# Altium PCB PHY.PcbDoc
Units mil, origin at the board's own origin, x right, y up, seen from the top; angles counter-clockwise.
Board outline 3245 x 2060 mil, 6 copper layers (Top Layer, Signal Layer 1, Plano 1, Signal Layer 2, Plano 2, Bottom Layer), stack 49.234 mil thick; 52 components, 54 nets, 192 pads, 51 vias.
Unrouted connection lines stored in the file: 9.
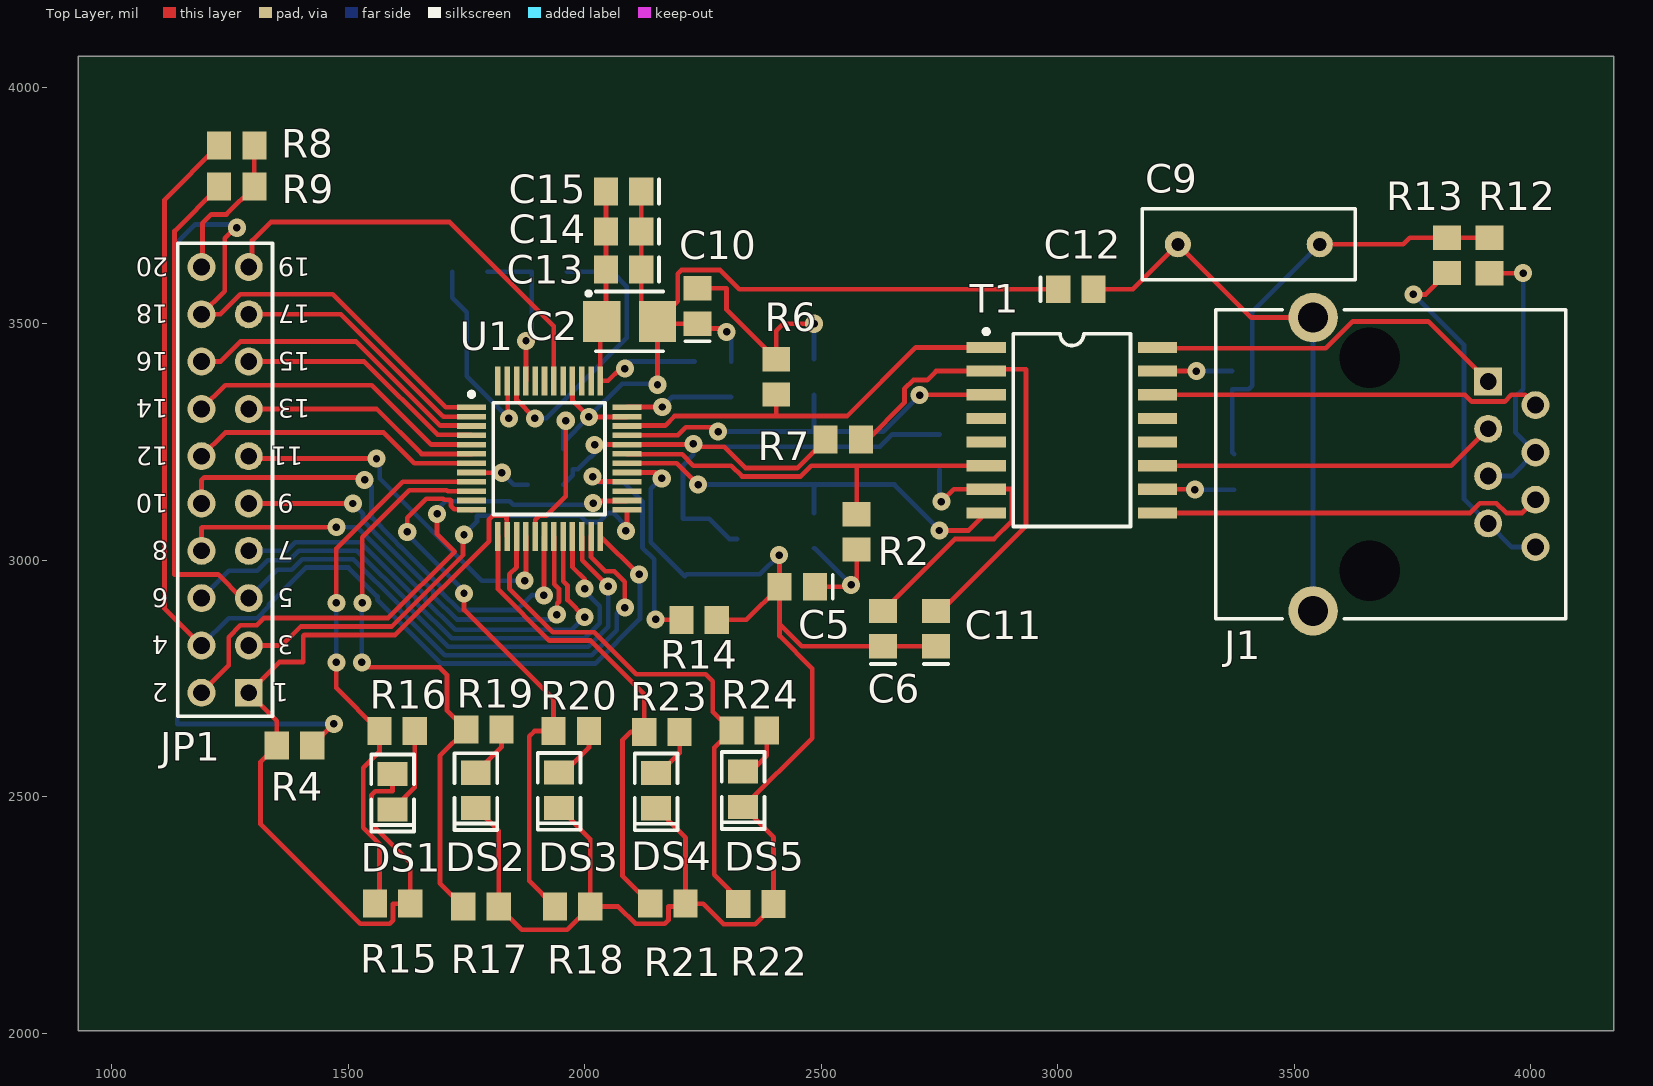
[diagram p0: Top Layer view]
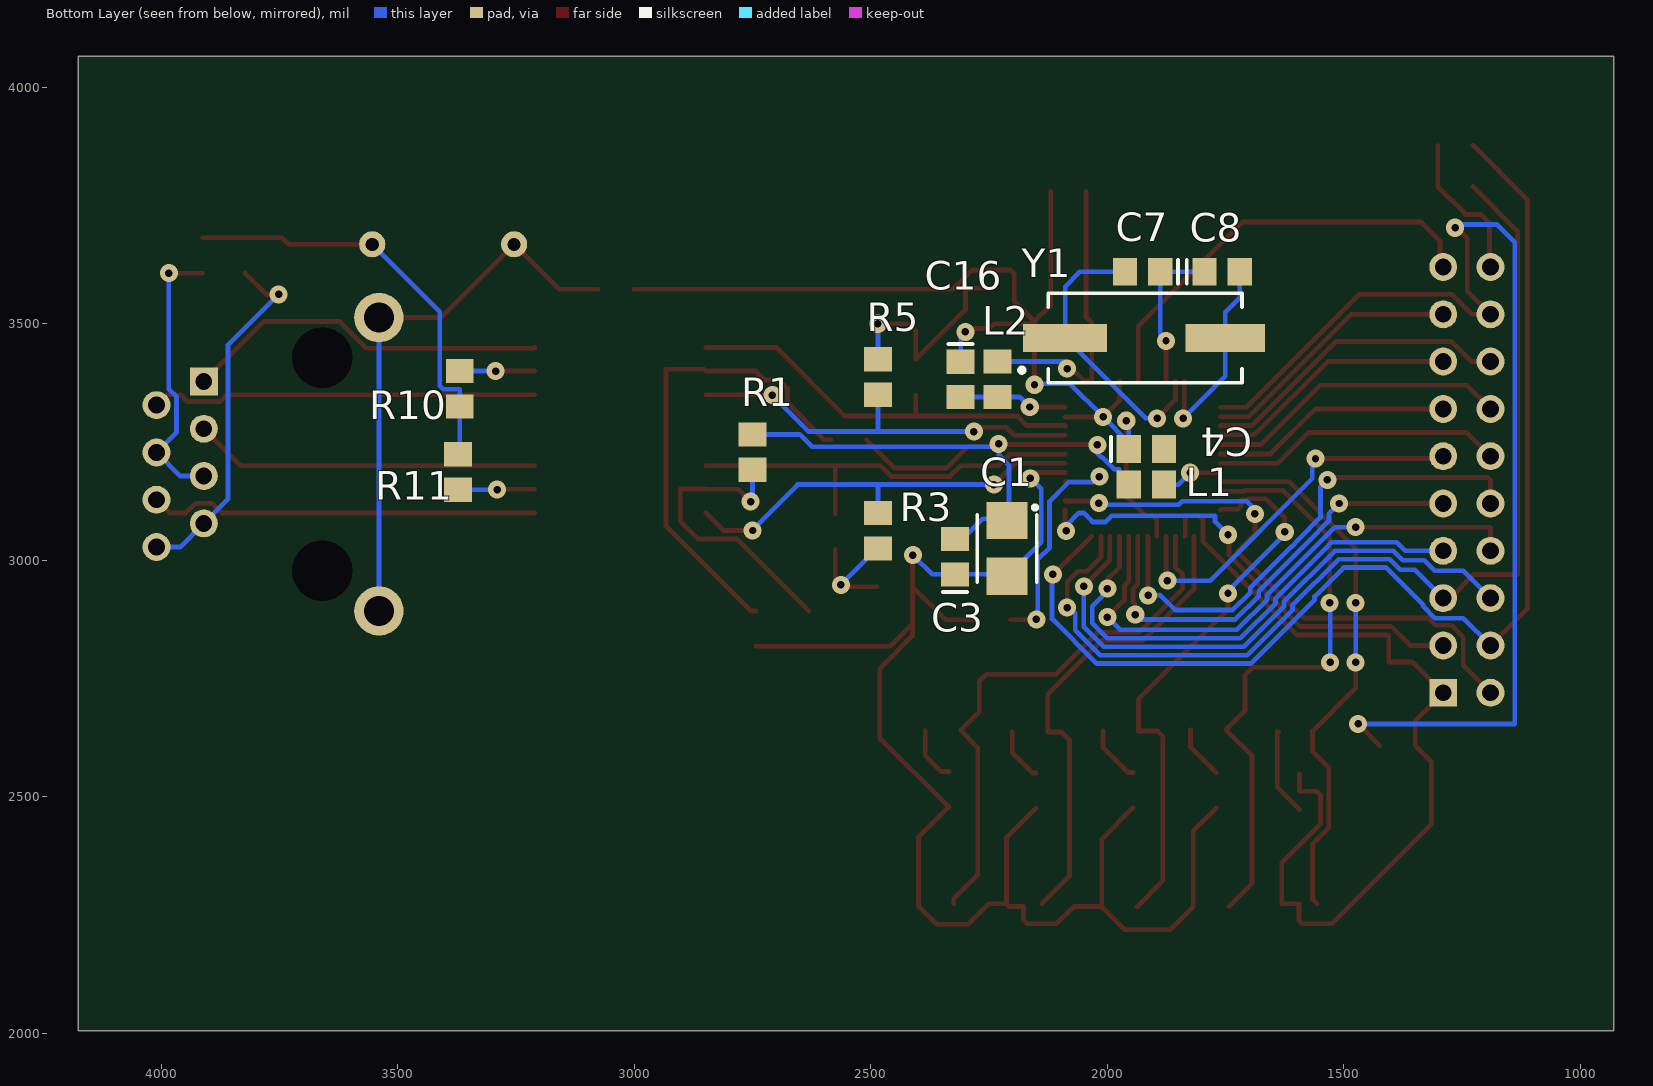
[diagram p1: Bottom Layer view, seen from below]
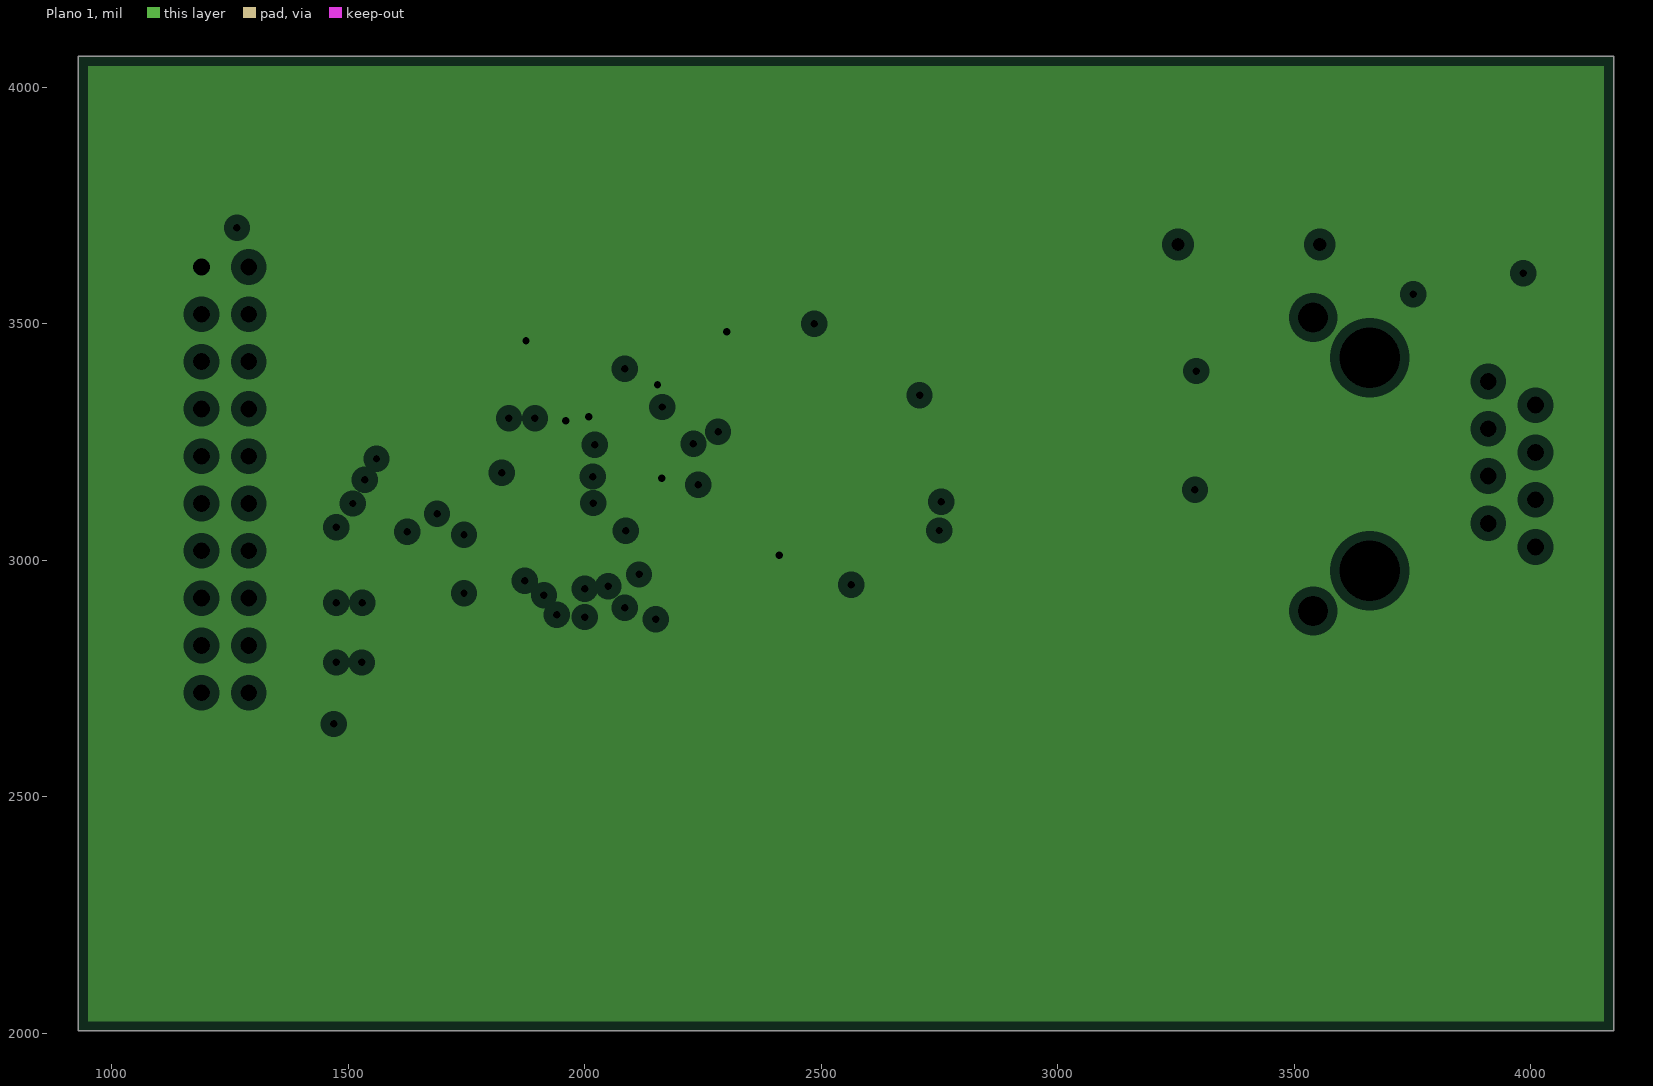
[diagram p2: Plano 1, clearances drawn from the general rule]
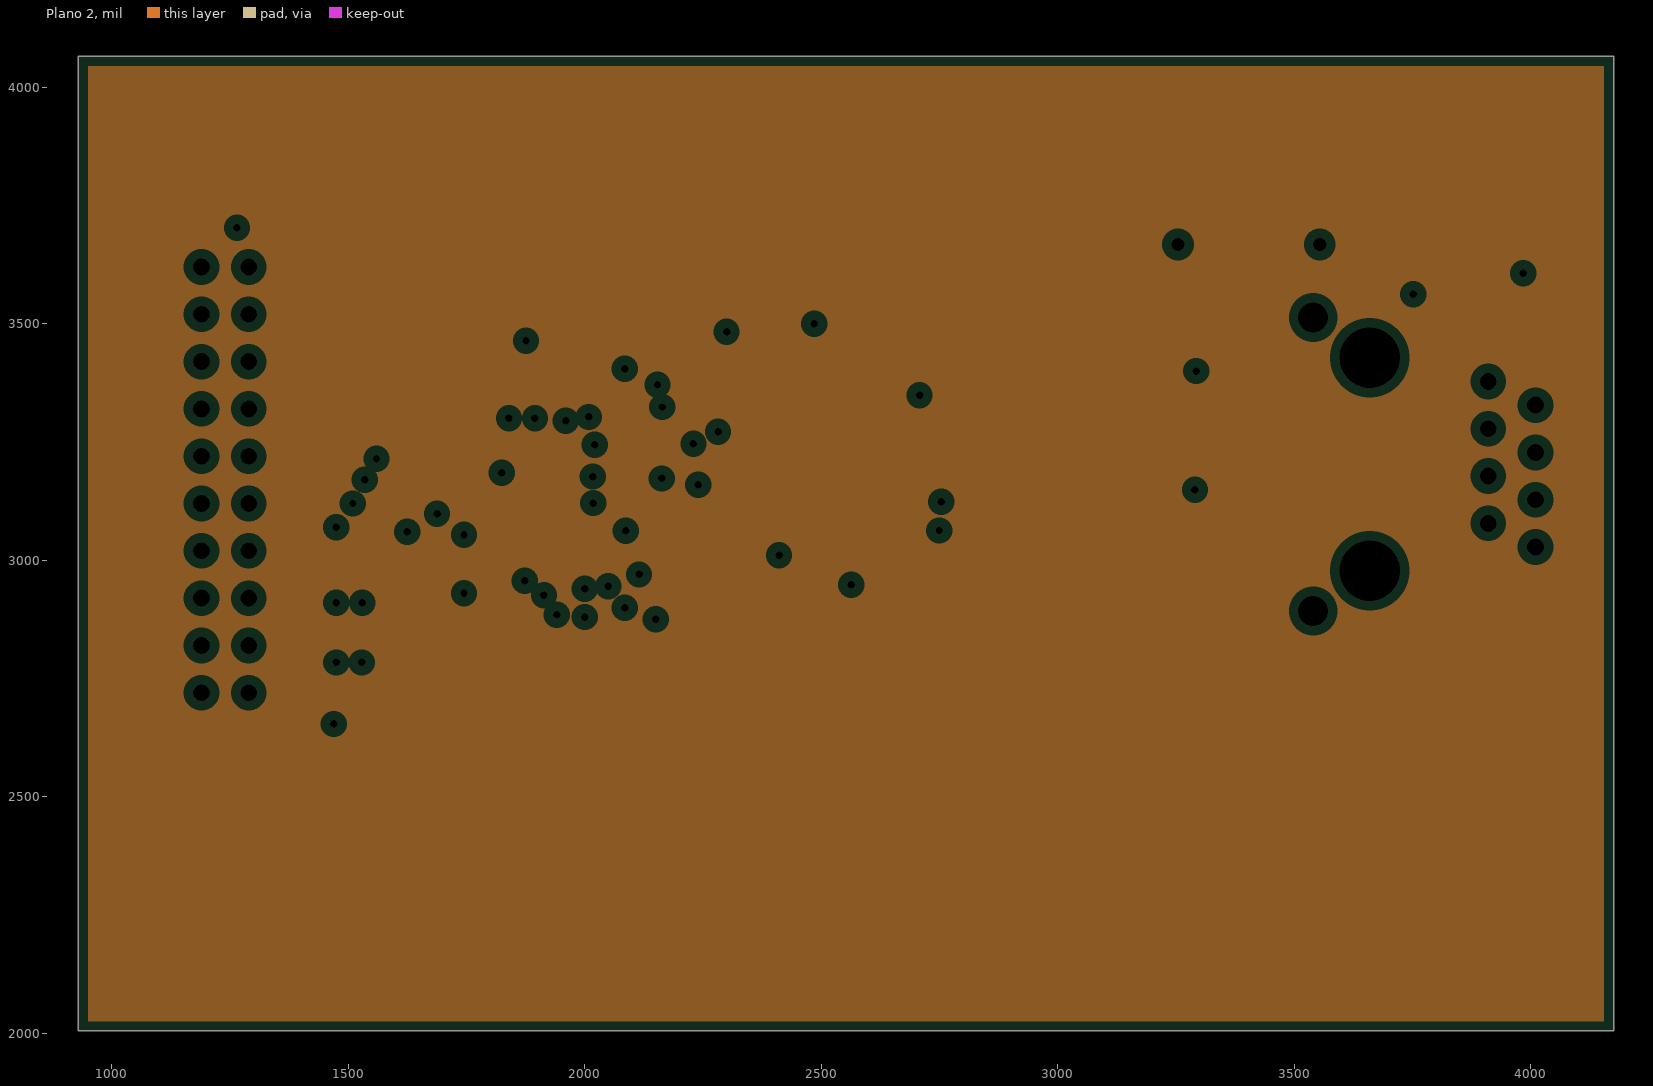
[diagram p3: Plano 2, clearances drawn from the general rule]

## Layer stack, top to bottom
Top Solder: solder mask 0.4, Solder Resist, Dk 3.5
Top Layer: signal copper 1.4
Dielectric1: core 10, FR-4, Dk 4.2
Signal Layer 1: signal copper 1.417
Dielectric 3: prepreg 5, Dk 4.2
Plano 1: plane copper 1.8, net GND
Dielectric 4: core 10, Dk 4.2
Signal Layer 2: signal copper 1.417
Dielectric 5: prepreg 5, Dk 4.2
Plano 2: plane copper 1.8
Dielectric 2: core 10, Dk 4.2
Bottom Layer: signal copper 1.4
Bottom Solder: solder mask 0.4, Solder Resist, Dk 3.5

## Board outline
930,4050 930,4062 930,4065 935,4065 940,4065 949,4065 968,4065 1770,4065 2572,4065 4175,4065 4175,3565 4175,3066 4175,2069 4175,2061 4175,2033 4175,2005 4119,2005 930,2005

## Design rules (kind name [scope] priority, off if disabled: settings)
Clearance Clearance_1 [All] p1: gap=7.85
Clearance [HasFootprint('TSQFP50P900X900-48') vs OnLayer('Top Layer')] p2: gap=8
ComponentClearance [All] p1: gap=8 collisioncheckmode=3 verticalgap=10 showdistances=FALSE
HoleSize [All] p1: absolutevalues=TRUE maxlimit=150 minlimit=1 maxpercent=80.000 minpercent=20.000
PlaneClearance [All] p1: clearance=20
PlaneConnect [All] p1: planeconnectstyle=Relief reliefexpansion=20 reliefentries=4 reliefconductorwidth=10 reliefairgap=10
PolygonConnect [All] p1: connectstyle=Relief reliefconductorwidth=10 reliefentries=4 polygonreliefangle="90 Angle" airgapwidth=10
RoomDefinition U_Ethernet_Con [InComponentClass('U_Ethernet_Con')] p1: confinementstyle=ConfineIn formatcopy=TRUE lockcomponents=FALSE outline 2795,2828 4087,2828 4087,3755 2795,3755
RoomDefinition U_RTL8201CL [InComponentClass('U_RTL8201CL')] p2: confinementstyle=ConfineIn formatcopy=TRUE lockcomponents=FALSE outline 1655,2768 2792,2768 2792,3822 1655,3822
RoomDefinition "U_Parallel Data Interface" [InComponentClass('U_Parallel Data Interface')] p3: confinementstyle=ConfineIn formatcopy=TRUE lockcomponents=FALSE outline 1040,2566 1462,2566 1462,3919 1040,3919
RoutingVias [All] p1: holewidth=15.75 width=38.19 viastyle="Through Hole" minholewidth=15.75 minwidth=38.19 maxholewidth=15.75 maxwidth=38.19
SilkToSolderMaskClearance SilkscreenOverComponentPads [IsPad] p1: minsilkscreentomaskgap=10 clearancetoexposedcopper=TRUE
SolderMaskExpansion [All] p1: expansion=4
Width Width_1 [(InNet('3V3') OR InNet('GND') OR InNet('PWFBIN') OR InNet('PWFBOUT'))] p1: maxlimit=20 minlimit=5 preferedwidth=10
Width [All] p2: maxlimit=10 minlimit=10 preferedwidth=10
25 further rules are at their usual default settings.

## Classes and differential pairs
net class LED[4..0]: LED0 LED1 LED2 LED3 LED4
component class U_RTL8201CL: C1 C2 C3 C4 C5 C6 C7 C8 C10 C11 C13 C14 C15 C16 L1 L2 R1 R2 R3 R5 R6 R7 R14 Y1
component class "U_Parallel Data Interface": JP1 R4 R8 R9
component class U_LEDS: DS1 DS2 DS3 DS4 DS5 R15 R16 R17 R18 R19 R20 R21 R22 R23 R24
component class U_Ethernet_Con: C9 C12 J1 R10 R11 R12 R13 T1

## Components (designator, comment, footprint, x,y, rotation, side; value= is the part's Value field where it differs from the comment)
C1 "22uF 10V" CAPC3528 2212,3025.06 r270 bottom
C2 "22uF 10V" CAPC3528 2095,3505 r0 top
C3 "100nF 50V" CAPC2012 2322,3007.6 r90 bottom
C4 "100nF 50V" CAPC2012 1917.4,3235 r180 bottom
C5 "100nF 50V" CAPC2012 2449.4,2944 r180 top
C6 "100nF 50V" CAPC2012 2631,2855.6 r90 top
C7 "20pF 50V" CAPC2012 1925.49,3609.96 r0 bottom
C8 "20pF 50V" CAPC2012 1757.4,3609.96 r180 bottom
C9 "100pF 3KV" CAPR7_5-3_6x7_5 3404,3668 r180 top
C10 "100nF 50V" CAPC2012 2238.96,3537.6 r90 top
C11 "100nF 50V" CAPC2012 2743,2855.6 r90 top
C12 "100nF 50V" CAPC2012 3038.6,3573 r0 top
C13 "100nF 50V" CAPC2012 2082.4,3614.45 r180 top
C14 "100nF 50V" CAPC2012 2082.4,3695 r180 top
C15 "100nF 50V" CAPC2012 2082.4,3780 r180 top
C16 "100nF 50V" CAPC2012 2310,3382.4 r270 bottom
DS1 "RED" LED2013 1594,2510.6 r90 top
DS2 "RED" LED2013 1770,2513.6 r90 top
DS3 "RED" LED2013 1946,2514 r90 top
DS4 "RED" LED2013 2151,2513 r90 top
DS5 "RED" LED2013 2335,2516 r90 top
J1 "RJ45 HEADER" 95122-2881 3775,3203 r270 top
JP1 "2x10 HEADER" HDR2X10 1290,2720 r90 top
L1 "30R@100MHz 600mA" INDC2012 1917.4,3159.93 r180 bottom
L2 "30R@100MHz 600mA" INDC2012 2232.21,3382.6 r270 bottom
R1 "0R 5%" RESC2012 2750,3228.6 r90 bottom
R2 "50R 1%" RESC2012 2575,3060 r270 top
R3 "50R 1%" RESC2012 2485,3062.6 r270 bottom
R4 "5K1 5%" RESC2012 1386.6,2608 r180 top
R5 "50R 1%" RESC2012 2485,3387.4 r270 bottom
R6 "50R 1%" RESC2012 2405,3387.6 r270 top
R7 "0R 5%" RESC2012 2546.6,3255 r180 top
R8 "5K1 5%" RESC2012 1264.4,3877 r180 top
R9 "5K1 5%" RESC2012 1264.4,3790 r180 top
R10 "75R 5%" RESC2012 3369,3362.6 r270 bottom
R11 "75R 5%" RESC2012 3373,3186.6 r90 bottom
R12 "75R 5%" RESC2012 3913,3644.21 r90 top
R13 "75R 5%" RESC2012 3823,3644.6 r90 top
R14 "2K 1%" RESC2012 2242,2874 r180 top
R15 "5K1 5%" RESC2012 1594,2274 r180 top
R16 "510R 5%" RESC2012 1603.6,2639 r180 top
R17 "5K1 5%" RESC2012 1781,2268 r180 top
R18 "5K1 5%" RESC2012 1974.6,2268 r180 top
R19 "510R 5%" RESC2012 1787,2642 r180 top
R20 "510R 5%" RESC2012 1971.6,2639 r180 top
R21 "5K1 5%" RESC2012 2176,2274 r180 top
R22 "5K1 5%" RESC2012 2362,2273 r180 top
R23 "510R 5%" RESC2012 2163.4,2637.21 r180 top
R24 "510R 5%" RESC2012 2347.6,2640.21 r180 top
T1 "TS6121C" SOIC127P910-16 3030,3275 r270 top
U1 "RTL8201CL" TSQFP50P900X900-48 1925,3215 r0 top
Y1 "25MHz" "XTAL_HC49SMD 20Mhz  +/-30ppm 20pf" 1920,3470 r180 bottom

## Footprints (in the part's own frame and the unit in brackets; to place one, negate y for a bottom-side part, rotate by r counter-clockwise, add the part's x,y. Pads: shape width x height; smd on the part's side, far side on the other; paste and mask are expansions set on the pad)
95122-2881 [mm]
  rect 1.5x1.5 hole 0.9: 1(-4.445,3.43)
  round 1.5 hole 0.9: 2(-3.175,5.97) 3(-1.905,3.43) 4(-0.635,5.97) 5(0.635,3.43) 6(1.905,5.97) 7(3.175,3.43) 8(4.445,5.97)
  round 2.65 hole 1.6: MH1(-7.875,-5.97) MH2(7.875,-5.97)
  round 2.95 hole 3.25 unplated: MH3(-5.715,-2.92) MH4(5.715,-2.92)
  silkscreen extent -8.3,-11.2 8.3,7.6
CAPC2012 [mm]
  rect 1.3x1.5 smd: 1(-0.95,0) 2(0.95,0)
  silkscreen extent -1.9,-0.65 -1.9,0.65
CAPC3528 [mm]
  rect 2x2.2 smd: 1(-1.5,0) 2(1.5,0)
  silkscreen extent -2.3,-1.6 1.8,1.6
CAPR7_5-3_6x7_5 [mm]
  round 1.4 hole 0.7: 1(-3.81,0) 2(3.81,0)
  silkscreen extent -5.71,-1.91 5.71,1.91
HDR2X10 [mm]
  rect 1.5x1.5 hole 0.9: 1(0,0)
  round 1.5 hole 0.9: 2(0,2.54) 3(2.54,0) 4(2.54,2.54) 5(5.08,0) 6(5.08,2.54) 7(7.62,0) 8(7.62,2.54) 9(10.16,0) 10(10.16,2.54) 11(12.7,0) 12(12.7,2.54) 13(15.24,0) 14(15.24,2.54) 15(17.78,0) 16(17.78,2.54) 17(20.32,0) 18(20.32,2.54) 19(22.86,0) 20(22.86,2.54)
  silkscreen extent -1.27,-1.27 24.13,3.81
INDC2012 [mm]
  rect 1.3x1.5 smd: 1(-0.95,0) 2(0.95,0)
LED2013 [mm]
  rect 1.3x1.6 smd: 1(0.95,0) 2(-0.95,0)
  silkscreen extent -2.13,-1.15 2,1.15
RESC2012 [mm]
  rect 1.3x1.5 smd: 1(-0.95,0) 2(0.95,0)
SOIC127P910-16 [mm]
  rect 0.6x2.1 smd: 1(-4.445,-4.6) 2(-3.175,-4.6) 3(-1.905,-4.6) 4(-0.635,-4.6) 5(0.635,-4.6) 6(1.905,-4.6) 7(3.175,-4.6) 8(4.445,-4.6) 9(4.445,4.6) 10(3.175,4.6) 11(1.905,4.6) 12(0.635,4.6) 13(-0.635,4.6) 14(-1.905,4.6) 15(-3.175,4.6) 16(-4.445,4.6)
  silkscreen extent -5.42,-4.72 5.17,3.15
TSQFP50P900X900-48 [mm]
  rect 1.55x0.3 smd: 1(-4.175,2.75) 2(-4.175,2.25) 3(-4.175,1.75) 4(-4.175,1.25) 5(-4.175,0.75) 6(-4.175,0.25) 7(-4.175,-0.25) 8(-4.175,-0.75) 9(-4.175,-1.25) 10(-4.175,-1.75) 11(-4.175,-2.25) 12(-4.175,-2.75) 25(4.175,-2.75) 26(4.175,-2.25) 27(4.175,-1.75) 28(4.175,-1.25) 29(4.175,-0.75) 30(4.175,-0.25) 31(4.175,0.25) 32(4.175,0.75) 33(4.175,1.25) 34(4.175,1.75) 35(4.175,2.25) 36(4.175,2.75)
  rect 0.3x1.55 smd: 13(-2.75,-4.175) 14(-2.25,-4.175) 15(-1.75,-4.175) 16(-1.25,-4.175) 17(-0.75,-4.175) 18(-0.25,-4.175) 19(0.25,-4.175) 20(0.75,-4.175) 21(1.25,-4.175) 22(1.75,-4.175) 23(2.25,-4.175) 24(2.75,-4.175) 37(2.75,4.175) 38(2.25,4.175) 39(1.75,4.175) 40(1.25,4.175) 41(0.75,4.175) 42(0.25,4.175) 43(-0.25,4.175) 44(-0.75,4.175) 45(-1.25,4.175) 46(-1.75,4.175) 47(-2.25,4.175) 48(-2.75,4.175)
  silkscreen extent -4.3,-3 3,3.57
"XTAL_HC49SMD 20Mhz  +/-30ppm 20pf" [mm]
  rect 4.5x1.5 smd: 1(-4.3,0)
  rect 4.25x1.5 smd: 2(4.3,0)
  silkscreen extent -6.75,-2.4 5.2,2.4

## Part data
C1 C2: library part CAP-P, "Polar Capacitor"
C3 C4 C5 C6 C7 C8 C9 C10 C11 C12 C13 C14 C15 C16: library part CAP-NP, "Capacitor"
DS1 DS2 DS3 DS4 DS5: library part DIO-LED-1S, "Typical GREEN SMD LED Agilent make"
J1: library part CON-RJ45-10-RA, "Right Angle, Standard Profile, External Shield PCB Jack"
JP1: library part CON-HDR-2x10-STR, "Header, 10-Pin, Dual row"
L1 L2: library part IND-FER, "Ferrite Bead"
R1 R2 R3 R4 R5 R6 R7 R8 R9 R10 R11 R12 R13 R14 R15 R16 R17 R18 R19 R20 R21 R22 R23 R24: library part RES, "Resistor"
T1: "Bothhand 10/100 BaseT Pulse Transformer"
U1: "Realtek Ethernet PHY tranceiver"
Y1: library part CRYS, "Surface Mount Crystal"

## Via types
v1: diameter 38.19, hole 15.75, Top Layer to Bottom Layer, 51 vias

## Nets (pads, with @x,y where several pads share a name; then routed paths per layer and width w, separated by ;. In a path a pad name is that pad's centre, name@x,y a point inside that pad or via, vN(x,y) a via of type N, cw(c..) or ccw(c..) an arc to the next point about the centre after c; other vN are vias at no path point)
3V3: C2.1 C13.2 C14.2 C15.2 DS1.1 JP1.1 L2.1 R4.2 R15.1 U1.14 U1.37 U1.38 U1.39 U1.41 U1.44 U1.48 | length 2537.4
  Top Layer w10: DS1.1 1594,2511.64 1557.18,2511.64 1549.65,2504.11 1549.65,2442.28 1631.4,2360.53 R15.1 1595.04,2274 1595.04,2239.15 1587.51,2231.62 1525.68,2231.62 1315,2442.3 1315,2573.8 R4.2 1349.2,2660.8 JP1.1 1355,2785 1405,2785 1405,2840 1407.15,2842.15 1599.64,2842.15 1797.97,3040.47 1797.97,3086.47 1805.5,3094 1834,3094 1835,3095 1835,3086.96 1835.49,3086.47 1835.49,3051.56 U1.14 ; C15.2 C14.2 C13.2 2045,3514.06 C2.1 2033.27,3502.32 U1.37 2049.37,3379.37 2075,3405 v1(2085,3405)
  Bottom Layer w10: v1(2085,3405) 2085,3415 2090,3420 L2.1
3V3A: C16.2 L2.2 U1.36 | length 229.8
  Top Layer w10: U1.36 2090.1,3324 v1(2164,3324)
  Bottom Layer w10: v1(2164,3324) 2185.2,3345.2 L2.2 2232.4,3345 C16.2
COL: JP1.18 R4.1 U1.1 | length 2462.3
  Top Layer w10: v1(1265,3703) 1261,3703 1239,3681 1239,3569 JP1.18 1230.06,3520 1272.44,3562.38 1467.62,3562.38 1706.73,3323.27 U1.1 ; R4.1 v1(1470,2654)
  Bottom Layer w10: v1(1265,3703) 1258,3710 1177,3710 1139,3672 1139,2654 v1(1470,2654)
CRS: JP1.5 R9.2 U1.23 | length 2217.1
  Top Layer w10: R9.2 1133,3696 1133,2970 1225,2970 1275,2920 JP1.5 ; U1.23 2013.58,3006.27 2043.1,2976.75 2063.04,2976.75 2085,2954.79 v1(2085,2900) v1@2080,2905
  Bottom Layer w10: JP1.5 1350,2980 1380.75,2980 1403.09,3002.34 1511.23,3002.34 1608.78,2904.79 1608.78,2894.79 1704.08,2799.49 2015.17,2799.49 2067.66,2851.98 2067.66,2887.66 2080,2900 v1(2085,2900)
GND: C1.2 C2.2 C3.1 C4.1 C5.2 C6.1 C7.1 C8.1 C10.1 C11.1 C12.1 C13.1 C14.1 C15.1 C16.1 DS2.2 DS3.2 DS4.2 DS5.2 JP1.20 R8.1 R9.1 R14.1 R17.1 R18.1 R21.1 R22.1 U1.11 U1.17 U1.29 U1.35 U1.40 U1.43 U1.45 | length 6349.4
  Top Layer w10: JP1.20 1192,3622 1192,3712 1211,3731 1242.8,3731 R9.1 R8.1 ; DS2.2 1818.4,2427.79 R17.1 1867.4,2219 1963,2219 R18.1 ; U1.45 1876,3379.58 v1(1876,3464) ; U1.17 1895.47,3085.54 1903.93,3094 1919,3094 1960,3135 v1(1960,3295) v1@1955,3300 ; DS3.2 2012,2410.6 R18.1 ; U1.40 1974.21,3337.79 v1(2009,3303) 2088.79,3303 U1.35 ; U1.29 2150.53,3185.47 v1(2163,3173) ; C15.1 C14.1 C13.1 2119.8,3539.25 C2.2 ; DS4.2 2213.4,2413.2 R21.1 ; v1@2154,3364.11 v1(2154,3371) ; v1@2154.06,3373 C2.2 ; R14.1 2342,2874 C5.2 ; v1(2300,3483) 2307,3490 2249.16,3490 C10.1 2158.86,3500.2 C2.2 ; v1(2411,3011) 2412,3010 C5.2 ; C11.1 C6.1 2458.8,2818.2 2412,2865 ; C12.1 2327.25,3573 2286.8,3613.44 2204.11,3613.44 2196.58,3605.91 2196.58,3547.53 C2.2 ; R18.1 2071.3,2268 2107.68,2231.62 2169.51,2231.62 2177.04,2239.15 2177.04,2268 2207.4,2268 R21.1 ; R21.1 2250.3,2274 2293.68,2230.62 2360.38,2230.62 2399.4,2269.64 R22.1 2399.4,2414.2 DS5.2 2335.46,2478.6 2481,2624.14 2481,2771 2412,2840 2412,2865 ; 2412,2865 C5.2
  Bottom Layer w10: C8.1 C7.1 1888.09,3476.09 v1(1876,3464) ; C4.1 C4.1@1954.8,3248.8 ; v1(1960,3295) 1959.61,3295 1954.8,3299.8 C4.1@1954.8,3248.8 ; v1@2154,3373 2079,3373 v1(2009,3303) C4.1@1954.8,3248.8 ; v1(2163,3173) 2162,3173 2140,3151 2140,3038 C1.2 2216.2,2970.2 C3.1 2370.2,2970.2 v1(2411,3011) ; v1(2300,3483) 2310,3473 C16.1
LED0: R15.2 R16.2 U1.9 | length 1165.1
  Top Layer w10: v1(1475,2784) 1475,2730.2 R16.2 1566.2,2595.46 1531.8,2561.06 1531.8,2434.89 1566.2,2400.48 1566.2,2283.6 R15.2 ; v1(1475,2910) 1475,3024.82 1615.97,3165.79 U1.9
  Bottom Layer w10: v1(1475,2784) v1(1475,2910)
LED1: R17.2 R19.2 U1.10 | length 1284.4
  Top Layer w10: v1(1529,2784) 1529,2774 1693,2774 1709,2758 1709,2682.6 R19.2 1694,2586.4 1694,2317.6 R17.2 ; v1(1530,2910) 1530,3048.57 1629.23,3147.8 1708.63,3147.8 1710.33,3146.1 U1.10
  Bottom Layer w10: v1(1529,2784) 1529,2909 v1(1530,2910)
LED2: R18.2 R20.2 U1.12 | length 1206.9
  Top Layer w10: v1@1625,3050 v1(1625,3060) 1625,3090 1664.95,3129.95 1701.23,3129.95 1703.18,3128 1716,3128 1717.26,3126.74 1717.26,3115.19 1724.79,3107.66 1759.7,3107.66 U1.12 U1.12@1760.63,3105.63 ; v1@1745,2940 v1(1745,2930) 1745,2895 1934.2,2705.8 R20.2 1894,2639 1883,2628 1883,2322.2 R18.2
  Bottom Layer w10: v1(1625,3060) 1625,3055 1745,2935 v1(1745,2930)
LED3: R21.2 R23.2 U1.13 | length 1016
  Top Layer w10: U1.13 1817,3050.36 1817,2938.57 1925.37,2830.2 2012.55,2830.2 2126,2716.75 R23.2 2097.21,2637.21 2080,2620 2080,2332.6 R21.2
LED4: R22.2 R24.2 U1.15 | length 1151.3
  Top Layer w10: U1.15 1856.1,2985.28 1841.05,2970.23 1841.05,2939.77 1932.77,2848.05 2019.95,2848.05 2109,2759 2256,2759 2271,2744 2271,2679.41 R24.2 2274,2604.02 2274,2335 2324.6,2284.4 R22.2
MDC: JP1.3 U1.25 | length 1034.4
  Top Layer w10: JP1.3 1359.75,2820 1399.75,2860 1592.25,2860 1742.85,3010.6 1742.85,3051.85 v1(1745,3054) ; v1(2087.19,3062.19) 2089.37,3064.37 U1.25
  Bottom Layer w10: v1@1742.85,3064.59 1745,3062.44 v1(1745,3054) 1772.32,3081.32 1772.32,3094.05 1990.77,3094.05 2003.77,3081.05 2031.23,3081.05 2050.18,3100 2060,3100 2087.19,3072.81 v1(2087.19,3062.19)
MDIO: JP1.2 U1.26 | length 1238.4
  Top Layer w10: JP1.2 1247.62,2777.62 1247.62,2837.55 1272.44,2862.38 1307.13,2862.38 1322.8,2878.05 1585.05,2878.05 1725,3018 1688,3055 v1(1688,3098) ; v1(2018,3121) 2022.49,3125.49 2088.44,3125.49 U1.26
  Bottom Layer w10: v1@1702,3098 v1(1688,3098) 1688,3108 1705,3125 1841.64,3125 1849.09,3117.55 2015.55,3117.55 2013.11,3120 2018,3124.89 v1(2018,3121)
NetC5_1: C5.1 R2.2 R3.2 | length 268
  Top Layer w10: C5.1 2559.39,2944 v1(2563.39,2948) 2575,2959.61 R2.2
  Bottom Layer w10: R3.2 2486.2,3025.2 v1(2563.39,2948)
NetC6_2: C6.2 R1.1 T1.7 | length 647.9
  Top Layer w10: C6.2 2783.15,3045.15 2865.37,3045.15 2903.09,3082.86 2903.09,3150.91 2849.81,3150.91 T1.7 2780,3150 v1(2754,3124)
  Bottom Layer w10: R1.1 2750,3128 v1(2754,3124)
NetC7_2: C7.2 U1.46 Y1.1 | length 608.2
  Top Layer w10: U1.46 1856.1,3338.9 v1(1895,3300)
  Bottom Layer w10: v1(1895,3300) 1919.29,3300 Y1.1 2089.29,3578.63 2057.96,3609.96 C7.2
NetC8_2: C8.2 U1.47 Y1.2 | length 440.5
  Top Layer w10: U1.47 1837.34,3378.44 1837.34,3302.66 v1(1840,3300)
  Bottom Layer w10: C8.2 1720,3555 1750.71,3524.29 Y1.2 1750.71,3389.29 v1(1840,3300)
NetC9_1: C9.1 R10.2 R11.2 R12.2 R13.2 | length 907.7
  Top Layer w10: C9.1 3730,3668 3744,3682 R13.2 3823.39,3681.61 R12.2
  Bottom Layer w10: R11.2 3369,3228 R10.2 3369,3361.56 3403.85,3361.56 3411.38,3369.09 3411.38,3525.38 C9.1
NetC9_2: C9.2 C12.2 J1.MH1 J1.MH2 | length 1187.6
  Top Layer w10: C12.2 3159,3573 C9.2 3408.96,3513.04 J1.MH1
  Bottom Layer w10: J1.MH2 J1.MH1
NetC10_2: C10.2 R5.1 R6.1 | length 475.9
  Top Layer w10: C10.2 2300,3575 2300,3530 R6.1 2405,3485 2420,3500 v1(2485,3500)
  Bottom Layer w10: R5.1 v1(2485,3500)
NetC11_2: C11.2 R7.1 T1.2 | length 1024
  Top Layer w10: R7.1 2598,3255 2676.05,3333.05 2676.05,3362.23 2694.77,3380.95 2723.95,3380.95 2743,3400 T1.2 2852.9,3404 2933,3404 2933,3072 2754,2893 C11.2
NetDS1_2: DS1.2 R16.1 | length 189.3
  Top Layer w10: DS1.2 1594.46,2473.2 1641,2519.74 R16.1 R16.1@1638.35,2636.35
NetDS2_1: DS2.1 R19.1 | length 113.5
  Top Layer w10: DS2.1 1824.4,2605.4 R19.1
NetDS3_1: DS3.1 R20.1 | length 119.8
  Top Layer w10: DS3.1 1956.4,2551.4 2009,2604 R20.1
NetDS4_1: DS4.1 R23.1 | length 111.8
  Top Layer w10: DS4.1 2158.4,2550.4 2200.8,2592.8 R23.1
NetDS5_1: DS5.1 R24.1 | length 117.1
  Top Layer w10: DS5.1 2351.4,2553.4 2385,2587 R24.1
NetJ1_1: J1.1 T1.16 | length 777
  Top Layer w10: T1.16 3211.1,3448.02 3566.89,3448.02 3623.7,3504.83 3783.21,3504.83 J1.1
NetJ1_2: J1.2 T1.14 | length 820
  Top Layer w10: T1.14 3860.81,3350 3875.19,3335.62 3944.89,3335.62 3959.27,3350 3988.04,3350 J1.2
NetJ1_3: J1.3 T1.11 | length 731.2
  Top Layer w10: T1.11 3832.04,3200 J1.3
NetJ1_4: J1.4 J1.5 R12.1 | length 595.1
  Top Layer w10: R12.1 3983.8,3606.8 v1(3984,3607)
  Bottom Layer w10: J1.5 3960.04,3178 J1.4 3967.66,3270.38 3967.66,3345.55 3984,3361.9 v1(3984,3607)
NetJ1_6: J1.6 T1.9 | length 827.4
  Top Layer w10: T1.9 3872.1,3100 3892.48,3120.38 3927.59,3120.38 3947.98,3100 3982.04,3100 J1.6
NetJ1_7: J1.7 J1.8 R13.1 | length 759.9
  Top Layer w10: v1(3752,3562) 3777.8,3562 R13.1
  Bottom Layer w10: v1(3752,3562) 3859,3455 3859,3129.04 J1.7 3960.04,3028 J1.8
NetR2_1: R2.1 T1.6 U1.31 | length 891.3
  Top Layer w10: U1.31 2090.3,3223.92 2206.08,3223.92 2230,3200 2310.04,3200 2332.89,3177.15 2456.59,3177.15 2479.45,3200 2575,3200 ; R2.1 2575,3200 ; T1.6 2575,3200
NetR3_1: R3.1 T1.8 U1.30 | length 897
  Top Layer w10: U1.30 2194.84,3205.16 v1(2240,3160) ; v1(2750,3063) 2811.9,3063 T1.8
  Bottom Layer w10: v1(2240,3160) 2490,3160 ; R3.1 2485,3155 2490,3160 ; v1(2750,3063) 2750,3065 2655,3160 2490,3160
NetR5_2: R5.2 T1.3 U1.33 | length 880.5
  Top Layer w10: U1.33 2197.21,3264.21 2214,3281 2273,3281 v1(2282,3272) ; v1(2708,3349) 2709,3350 T1.3
  Bottom Layer w10: v1(2282,3272) 2485,3272 ; R5.2 2485,3272 ; v1(2708,3349) 2631,3272 2485,3272
NetR6_2: R6.2 T1.1 U1.34 | length 873.5
  Top Layer w10: U1.34 2090.3,3284.82 2170.01,3284.82 2190.18,3305 2405,3305 ; R6.2 2405,3305 ; T1.1 2700,3450 2555,3305 2405,3305
NetR10_1: R10.1 T1.15 | length 157.9
  Top Layer w10: T1.15 v1(3293,3400)
  Bottom Layer w10: v1(3293,3400) R10.1
NetR11_1: R11.1 T1.10 | length 162.2
  Top Layer w10: T1.10 3289.39,3150 v1(3290.2,3149.2)
  Bottom Layer w10: v1(3290.2,3149.2) R11.1
NetR14_2: R14.2 U1.28 | length 545.7
  Top Layer w10: v1@2009,3186 v1@2017,3178 ; v1(2017,3177) v1@2017,3178 ; U1.28 2088.44,3166.71 2028.29,3166.71 v1@2017,3178 ; v1(2150,2875) 2151,2874 R14.2
  Bottom Layer w10: v1@2009,3186 v1@2017,3178 ; v1(2017,3177) v1@2017,3178 ; v1(2150,2875) 2146.95,2878.05 2146.95,3001.95 2122.15,3026.75 2122.15,3125 2082.15,3165 2030,3165 v1@2017,3178
PWFBIN: C4.2 L1.2 U1.8 | length 129.9
  Top Layer w10: U1.8 1761.1,3185 v1(1825,3185)
  Bottom Layer w10: v1(1825,3185) 1850.07,3159.93 L1.2
PWFBOUT: C1.1 C3.2 L1.1 R1.2 R7.2 U1.32 | length 1485.8
  Top Layer w10: v1(2021,3244) 2021.53,3244.53 U1.32 2228.53,3244.53 v1(2230,3246) 2235.95,3240.05 2295.23,3240.05 2340.28,3195 2449.2,3195 R7.2
  Bottom Layer w10: L1.1 1954.8,3159.99 1975.05,3180.23 1975.05,3192.62 1985.72,3192.62 2011.05,3217.95 2012.82,3217.95 2021,3226.13 v1(2021,3244) ; C3.2 2306,3045 2262.94,3088.06 2208.05,3088.06 2208.05,3201.05 2229.62,3222.62 2229.62,3245.62 v1(2230,3246) 2235.95,3240.05 2624.3,3240.05 2650.25,3266 R1.2
RESETB: JP1.19 U1.42 | length 919.6
  Top Layer w10: JP1.19 1296.95,3626.95 1296.95,3675.78 1336.17,3715 1715,3715 1934.84,3495.16 U1.42
RXC: JP1.11 U1.16 | length 811.3
  Top Layer w10: JP1.11 1295,3215 v1(1560,3215) ; v1(1873,2957) 1873,2955 1875.79,2957.79 U1.16
  Bottom Layer w10: v1(1560,3215) 1566.95,3208.05 1566.95,3172.87 1782.82,2957 v1(1873,2957)
RXD0: JP1.7 U1.21 | length 1060.3
  Top Layer w10: U1.21 1974.21,2985.79 2000,2960 v1(2000,2940)
  Bottom Layer w10: JP1.7 1370.25,3020 1388.3,3038.05 1526.2,3038.05 1539.49,3024.76 1539.49,3024.58 1644.49,2919.58 1644.49,2909.58 1718.87,2835.2 2000.38,2835.2 2031.95,2866.77 2031.95,2903.05 2000,2935 v1(2000,2940)
RXD1: JP1.8 U1.20 | length 1155.8
  Top Layer w10: JP1.8 1190,3068.83 1191.17,3070 v1(1475,3070) ; U1.20 1954.53,2955.9 1963.8,2946.63 1963.8,2916.2 v1(2000,2880)
  Bottom Layer w10: v1(1475,3070) 1519.5,3070 1557.34,3032.16 1557.34,3031.98 1662.34,2926.98 1662.34,2916.98 1726.27,2853.05 1973.05,2853.05 v1(2000,2880)
RXD2: JP1.9 U1.19 | length 943.8
  Top Layer w10: JP1.9 v1(1510,3120) ; U1.19 1935.77,3049.7 1935.77,2949.41 1945.95,2939.23 1945.95,2912.77 1941.95,2908.77 1941.95,2885.95 v1(1941,2885)
  Bottom Layer w10: v1(1510,3120) 1531.69,3098.31 1531.69,3083.06 1575.2,3039.55 1575.2,3039.37 1680.2,2934.37 1680.2,2924.37 1729.57,2875 1931,2875 v1(1941,2885)
RXD3: JP1.10 U1.18 | length 1077.2
  Top Layer w10: JP1.10 1190,3168.83 1196.17,3175 1535,3175 v1(1535,3170) ; v1(1914,2926) 1914.23,2926.23 1914.23,3049.7 U1.18
  Bottom Layer w10: v1(1535,3170) 1549.54,3155.46 1549.54,3090.46 1593.05,3046.95 1593.05,3046.77 1611.77,3028.05 1611.95,3028.05 1619.91,3020.09 1619.91,3019.91 1698.05,2941.77 1698.05,2931.77 1734.82,2895 1857,2895 1889,2927 1890,2926 v1(1914,2926)
RXDV: JP1.6 U1.22 | length 1223.1
  Top Layer w10: U1.22 1994.82,3049.7 1994.82,2999.78 v1(2049.8,2944.8)
  Bottom Layer w10: JP1.6 1247.62,2977.62 1307.56,2977.62 1329.94,3000 1375.5,3000 1395.7,3020.2 1518.81,3020.2 1521.64,3017.37 1521.64,3017.19 1626.64,2912.19 1626.64,2902.19 1711.48,2817.34 2007.77,2817.34 2049.8,2859.37 v1(2049.8,2944.8)
RXER: JP1.4 R8.2 U1.24 | length 2471.4
  Top Layer w10: JP1.4 1112,2898 1112,3762 R8.2 ; U1.24 2113.9,2970 v1(2115,2970)
  Bottom Layer w10: JP1.4 1247.62,2877.62 1307.56,2877.62 1332.38,2902.45 1332.38,2906.38 1410.49,2984.49 1500.69,2984.49 1561.95,2923.23 1561.95,2916.37 1696.69,2781.64 2022.57,2781.64 2116.95,2876.02 2116.95,2968.05 v1(2115,2970)
TXC: JP1.12 U1.7 | length 618.2
  Top Layer w10: JP1.12 1240,3270 1575,3270 1639.84,3205.16 U1.7
TXD0: JP1.13 U1.6 | length 510
  Top Layer w10: JP1.13 1560,3320 1655.16,3224.84 U1.6
TXD1: JP1.14 U1.5 | length 643.3
  Top Layer w10: JP1.14 1240,3370 1550,3370 1675.47,3244.53 U1.5
TXD2: JP1.15 U1.4 | length 535.2
  Top Layer w10: JP1.15 1534.25,3420 1689.11,3265.14 1759.7,3265.14 U1.4
TXD3: JP1.16 U1.3 | length 662.1
  Top Layer w10: JP1.16 1230.06,3420 1272.44,3462.38 1517.12,3462.38 1694.68,3284.82 1759.7,3284.82 U1.3
TXEN: JP1.17 U1.2 | length 561.6
  Top Layer w10: JP1.17 1484.75,3520 1699.34,3305.41 1699.59,3305.41 1701.42,3303.58 U1.2 U1.2@1759.7,3304.51
pads on no net: J1.MH3 J1.MH4 T1.4 T1.5 T1.12 T1.13 U1.27

## Polygon pours and split planes (outlines as drawn)
GND on Plano 1 (split plane): 4154.9,3565 4154.9,3066 4154.9,2069 4154.9,2061 4154.9,2033 4154.9,2025.1 950.1,2025.1 950.1,4044.9 4154.9,4044.9
no net on Plano 2 (split plane): 4154.9,3565 4154.9,3066 4154.9,2069 4154.9,2061 4154.9,2033 4154.9,2025.1 950.1,2025.1 950.1,4044.9 4154.9,4044.9

## Text inside footprints (layer, text, board x,y; h text height)
JP1: Top Overlay "18" at 1120,3540 h39.37 r180; Top Overlay "17" at 1420,3540 h39.37 r180; Top Overlay "14" at 1120,3340 h39.37 r180; Top Overlay "13" at 1420,3340 h39.37 r180; Top Overlay "10" at 1120,3140 h39.37 r180; Top Overlay "9" at 1385,3140 h39.37 r180; Top Overlay "8" at 1120,3040 h39.37 r180; Top Overlay "7" at 1385,3040 h39.37 r180; Top Overlay "4" at 1120,2840 h39.37 r180; Top Overlay "3" at 1385,2840 h39.37 r180; Top Overlay "5" at 1385,2940 h39.37 r180; Top Overlay "11" at 1405,3240 h39.37 r180; Top Overlay "15" at 1420,3440 h39.37 r180; Top Overlay "6" at 1120,2940 h39.37 r180; Top Overlay "12" at 1120,3240 h39.37 r180; Top Overlay "16" at 1120,3440 h39.37 r180; Top Overlay "20" at 1120,3640 h39.37 r180; Top Overlay "19" at 1420,3640 h39.37 r180; Top Overlay "1" at 1375,2740 h39.37 r180; Top Overlay "2" at 1120,2740 h39.37 r180